# Altium PCB UVM AERO BSPD.PcbDoc (part 2 of 2)
Units mil, origin at the board's own origin, x right, y up, seen from the top; angles counter-clockwise.
Board outline 3235 x 3490 mil, 2 copper layers (Top Layer, Bottom Layer), stack 58.8 mil thick; 114 components, 64 nets, 312 pads, 72 vias.
Unrouted connection lines stored in the file: 7.
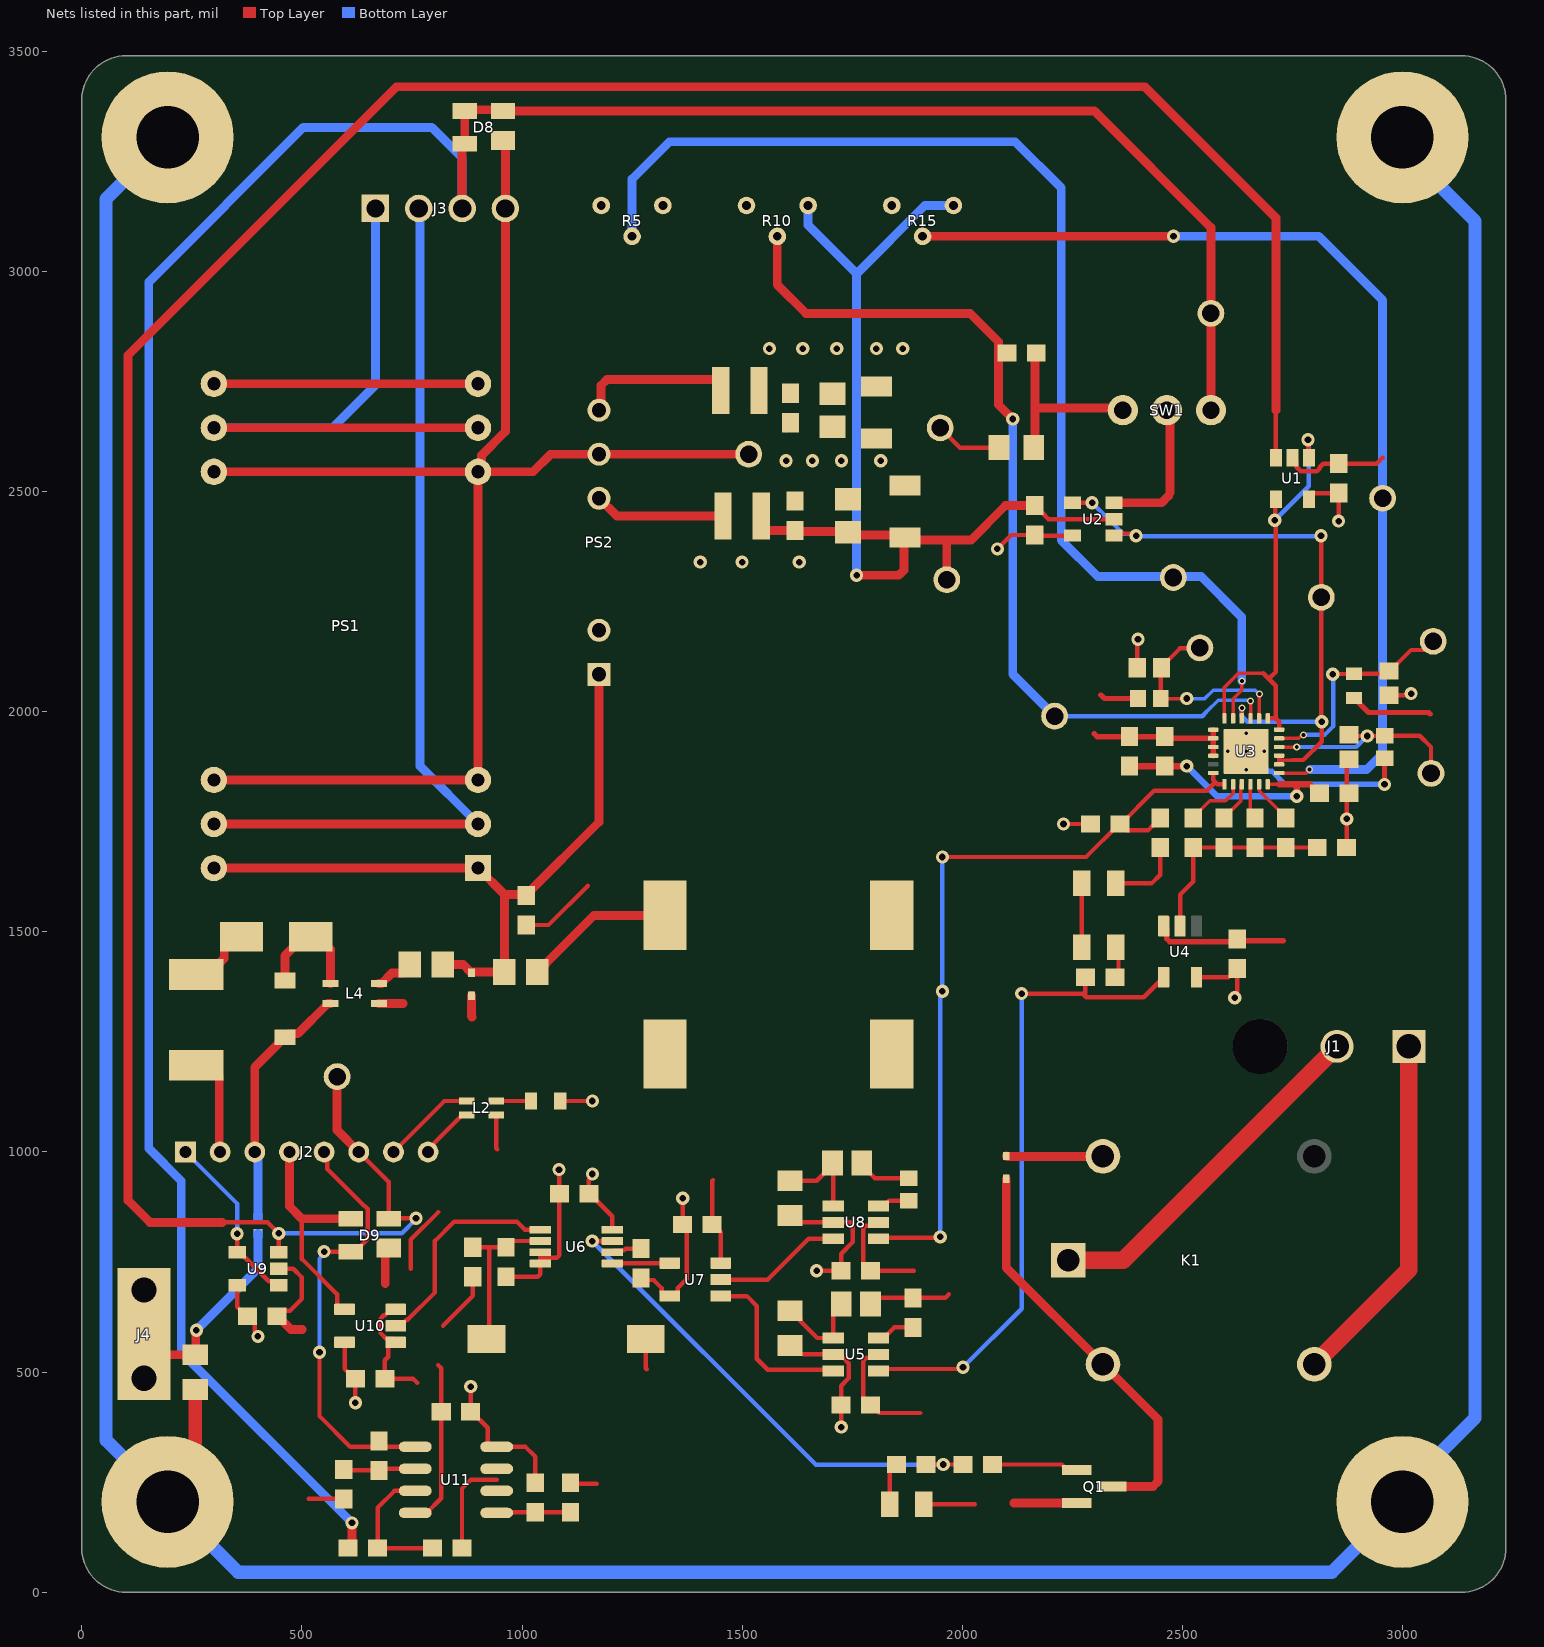
[diagram p2: the nets of this part, all layers, seen from the top]

## Part data (continued)
SW2: library part CMP-2000-07501-1, "FSMSM Push Button Switch, 50 mA, -35 to 85 degC, 2-Pin SMD, RoHS, Tape and Reel", Case\/Package=SMD/SMT, Contact Current Rating=50mA, Contact Resistance=100mOhm, Manufacturer="TE Connectivity", Max Operating Temperature=85degC, Max Voltage Rating (DC)=12V, Min Operating Temperature=-35degC, Operating Force=180gf, Package Description="2-Pin Surface Mount Device, Body 6 x 3.5 mm, Pitch 9.19 mm", Package Quantity=1800, Voltage Rating (DC)=24V, Actuator Length=1.07mm, Actuator Material=Polyamide, Contact Material=Brass, Contact Plating=Silver, Current Rating=50mA, Datasheet URL=http://www.te.com/commerce/DocumentDelivery/DDEController?Action=showdoc&DocId=Customer+Drawing%7F1437566-3%7FC2%7Fpdf%7FEnglish%7FENG_CD_1437566-3_C2_1437566_3_1_c.dwg.pdf%7F1437566-4, Datasheet Version="Rev. C2, 08/2014", Electrical Life=20000Cycles, ELV=Compliant, Illumination Type=Illuminated, Lead Free=LeadFree, Manufacturer URL=http://www.te.com/, Mechanical Life=20000Cycles, Mount=SurfaceMount, Mounting Technology=SurfaceMount, Orientation=Straight, Package Reference=FSMSMTR, Packaging=TapeandReel, REACH SVHC=Unknown, RoHSCompliant=true, Switch Travel=0.25mm, Termination=GullWing, Throw Configuration=SPST
TP1 TP2 TP3 TP4 TP5 TP9 TP10 TP11 TP12: "Test Point, White, 1-Pin THD, RoHS, Bulk", Color=White, Manufacturer=KeystoneElectronics, Supplier Part Number 1=36-5002-ND, Brand=KeystoneElectronics, Contact Material=PhosphorBronze, Datasheet URL=https://ciiva.com/datasheet-click-2917627?src=ciiva&sig=bd195616, Datasheet Version="Rev. G, 12/2008", Length=7.62mm, Manufacturer URL=http://www.keyelco.com/, Material=Nylon, Mounting Hole Size=1mm, Outside Diameter=2.54mm, Packaging=Bulk, Plating=Silver, Product=TestPoints, Product Category=CircuitBoardHardware-PCB, RoHS=True, Supplier 1=Digi-Key, Type=Miniature
TP6: "Test Point, Red, 1-Pin THD, RoHS, Bulk", Color=Red, Manufacturer=KeystoneElectronics, Supplier Part Number 1=36-5000-ND, Brand=KeystoneElectronics, Contact Material=PhosphorBronze, Datasheet URL=https://ciiva.com/datasheet-click-2917627?src=ciiva&sig=bd195616, Datasheet Version="Rev. G, 12/2008", Length=7.62mm, Manufacturer URL=http://www.keyelco.com/, Material=Nylon, Mounting Hole Size=1mm, Outside Diameter=2.54mm, Packaging=Bulk, Plating=Silver, Product=TestPoints, Product Category=CircuitBoardHardware-PCB, RoHS=True, Supplier 1=Digi-Key, Type=Miniature
TP7: "Test Point, Black, 1-Pin THD, RoHS, Bulk", Color=Red, Manufacturer=KeystoneElectronics, Supplier Part Number 1=36-5001-ND, Brand=KeystoneElectronics, Contact Material=PhosphorBronze, Datasheet URL=https://ciiva.com/datasheet-click-2917627?src=ciiva&sig=bd195616, Datasheet Version="Rev. G, 12/2008", Length=7.62mm, Manufacturer URL=http://www.keyelco.com/, Material=Nylon, Mounting Hole Size=1mm, Outside Diameter=2.54mm, Packaging=Bulk, Plating=Silver, Product=TestPoints, Product Category=CircuitBoardHardware-PCB, RoHS=True, Supplier 1=Digi-Key, Type=Miniature
TP8: "Test Point, Green, 1-Pin THD, RoHS, Bulk", Color=Red, Manufacturer=KeystoneElectronics, Supplier Part Number 1=36-5116-ND, Brand=KeystoneElectronics, Contact Material=PhosphorBronze, Datasheet URL=https://ciiva.com/datasheet-click-2917627?src=ciiva&sig=bd195616, Datasheet Version="Rev. G, 12/2008", Length=7.62mm, Manufacturer URL=http://www.keyelco.com/, Material=Nylon, Mounting Hole Size=1mm, Outside Diameter=2.54mm, Packaging=Bulk, Plating=Silver, Product=TestPoints, Product Category=CircuitBoardHardware-PCB, RoHS=True, Supplier 1=Digi-Key, Type=Miniature
U1 U2 U9: library part CMP-1310-00381-1, "Low Voltage, Rail-to-Rail Output Operational Amplifier, 1.7 to 5.5 V, -40 to 85 degC, 5-Pin TSOP, Pb-Free, Tape and Reel", Manufacturer="On Semiconductor", ComponentLink1Description="Manufacturer URL", ComponentLink1URL=http://www.onsemi.com/, ComponentLink2Description=Datasheet, ComponentLink2URL=http://www.onsemi.cn/pub_link/Collateral/NCS2003-D.PDF, ComponentLink3Description="Package Specification", ComponentLink3URL=http://www.onsemi.com/pub_link/Collateral/483.PDF, DatasheetVersion="Rev. 3", Mounting Technology="Surface Mount", PackageDescription="5-Pin Small Outline Package, Body 3 x 1.5 mm, Pitch 0.95 mm", PackageReference=TSOP-5-483-02, PackageVersion="Rev. K, 04/2013", Packing="Tape and Reel", PartNumber=NCS2003SN2T1G, RoHS=TRUE, VCC Max (V)=5.5, VCC Min (V)=1.7
U3: "Hex Window Comparator with 1.5% Precision and 400mV Reference, 24-pin LLP, 250 Reel", Manufacturer="Texas Instruments", PackageTopMarking=NS*UZXYTT*L7231SQ, PowerWise=N, Supplier Part Number 1=LMV7231SQE/NOPBCT-ND, Code_JEDEC=MO-220-WGGD-6, ComponentLink1Description="Datasheet URL", ComponentLink1URL=http://www.ti.com/general/docs/lit/getliterature.tsp?genericPartNumber=LMV7231&fileType=pdf, CompType=Comparator, PackageDescription="LLP, Plastic, Quad, 4 x 4 x 0.8mm Body, 24 Lead, 0.5mm Pitch, No Pullback", PackageReference=RTW0024A, PinCount=24, RoHS=Y, Supplier 1=Digi-Key
U4: library part CMP-0859-00134-3, "Single Inverter, DBV0005A, LARGE T&R", F @ Nom Voltage(Max)(Mhz)=150, Generic Part Number=SN74LVC1G04, ICC @ Nom Voltage(Max)(mA)=0.01, Manufacturer="Texas Instruments", Operating Temperature Range(C)="-40 to 125,-40 to 85", Rating=Catalog, tpd @ Nom Voltage(Max)(ns)=7.5,5.2,4.2,3.7, Voltage(Nom)(V)=1.8,2.5,3.3,5, 3-State Output=No, Bits(#)=1, DatasheetVersion=SCES214AD, Input Type=CMOS/TTL, Logic=Inverting, Output Drive (IOL/IOH)(Max)(mA)=32/-32, Output Type=CMOS, PackageReference=DBV0005A, Schmitt Trigger=No, Sub-Family="Inverting Buffer/Driver", Technology Family=LVC, VCC(Max)(V)=5.5, VCC(Min)(V)=1.65
U5 U8: "IC DELAY LINE 8TAP PROG TSOT23-6", Capacitance=SKIP, Digikey Part Number=LTC6994CS6-1#TRMPBFCT-ND, Manufacturer="Linear Technologies", Mouser Part Number=584-C6994CS6-1TRMPBF, Package=TSOT23-6, Temperature="0°C to +70°C", Temperature Range High=+70°C, Temperature Range Low=0°C, ComponentLink1Description=Upverter, ComponentLink1URL=https://upverter.com/upn/revision/f62c3d807553aaaa/, ComponentLink2Description=Datasheet, ComponentLink2URL=http://cds.linear.com/docs/en/datasheet/699412fb.pdf, Datasheet Path=datasheets/IC_Linear_Technologies_LTC6994CS6-1#TRMPBF_eec.pdf, Datasheet Path1=datasheets/IC_Linear_Technologies_LTC6994CS6-1#TRMPBF_eec.pdf, Digikey Description="IC DELAY LINE 8TAP PROG TSOT23-6", helpURL=https://upverter.com/upn/revision/f62c3d807553aaaa/, Inductance=SKIP, Lead Free=yes, Library Path1=parts/IC_Linear_Technologies_LTC6994CS6-1#TRMPBF_eec.SchLib, Library Ref1=LTC6994CS6-1#TRMPBF, Part Number=LTC6994CS6-1#TRMPBF, Price=2.01987952065, Resistance=SKIP, RoHS=TRUE, Supplier 1=Digi-Key, Supplier 2=Mouser, Supplier Part Number 1=LTC6994CS6-1#TRMPBFCT-ND, Supplier Part Number 2=584-C6994CS6-1TRMPBF, Voltage=SKIP
U6: library part CMP-0859-00537-3, "Single Positive-Edge-Triggered D-Type Flip-Flop with Clear and Preset, DCT0008A, LARGE T&R", F @ Nom Voltage(Max)(Mhz)=150, Generic Part Number=SN74LVC2G74, ICC @ Nom Voltage(Max)(mA)=0.01, Manufacturer="Texas Instruments", Operating Temperature Range(C)="-40 to 125,-40 to 85", Rating=Catalog, tpd @ Nom Voltage(Max)(ns)=13.4,7.1,5.9,4.1, Voltage(Nom)(V)=1.8,2.5,3.3,5, 3-State Output=No, Bits(#)=1, DatasheetVersion=SCES203O, Input Type=CMOS/TTL, Logic=True, Output Drive (IOL/IOH)(Max)(mA)=32/-32, Output Type=CMOS, PackageReference=DCT0008A, Schmitt Trigger=No, Sub-Family="D-Type Flip-Flop", Technology Family=LVC, VCC(Max)(V)=5.5, VCC(Min)(V)=1.65
U7: library part CMP-0859-00067-3, "Single 2-Input Positive-OR Gate, DBV0005A, LARGE T&R", F @ Nom Voltage(Max)(Mhz)=75, Generic Part Number=SN74AHCT1G32, ICC @ Nom Voltage(Max)(mA)=0.01, Manufacturer="Texas Instruments", Operating Temperature Range(C)="-40 to 125", Rating=Catalog, tpd @ Nom Voltage(Max)(ns)=8, Voltage(Nom)(V)=5, 3-State Output=No, Bits(#)=1, DatasheetVersion=SCLS320O, Gate Type=OR, Input Type=CMOS, Logic=True, Output Drive (IOL/IOH)(Max)(mA)=8/-8, Output Type=CMOS, PackageReference=DBV0005A, Schmitt Trigger=No, Sub-Family="OR Gate", Technology Family=AHCT, VCC(Max)(V)=5.5, VCC(Min)(V)=2
U10: library part CMP-0859-00122-3, "Single Power Supply, Single BUFFER GATE w/ 3-State Output (active low enable), DBV0005A, LARGE T&R", F @ Nom Voltage(Max)(Mhz)=50, Generic Part Number=SN74LV1T125, ICC @ Nom Voltage(Max)(mA)=0.01, Manufacturer="Texas Instruments", Operating Temperature Range(C)="-40 to 125", Rating=Catalog, tpd @ Nom Voltage(Max)(ns)=14.5,9.5,8.0,6.5, Voltage(Nom)(V)=1.8,2.5,3.3,5.5, 3-State Output=Yes, Bits(#)=1, DatasheetVersion=SCLS745A, Input Type=TTL, Logic=True, Output Drive (IOL/IOH)(Max)(mA)=8/-8, Output Type=CMOS, PackageReference=DBV0005A, Schmitt Trigger=No, Special Features="1.8V to 3.3V Up Translation,3.3V to 1.8V Down Translation,5V Input Tolerant", Sub-Family="Non-Inverting Buffer/Driver", Technology Family=LV1T, VCC(Max)(V)=5.5, VCC(Min)(V)=1.6
U11: library part CMP-0187-00288-2, "1 MHz, Low-Power Operational Amplifier, 8-Pin SOIC, Industrial Temperature, Tape and Reel", Code_IPC=SOIC127P600-8, Code_JEDEC=MS-012, ComponentLink1Description="Manufacturer URL", ComponentLink1URL=http://www.microchip.com/, ComponentLink2Description=Datasheet, ComponentLink2URL=http://ww1.microchip.com/downloads/en/DeviceDoc/21733j.pdf, ComponentLink3Description="Package Specification", ComponentLink3URL=http://www.microchip.com/stellent/groups/techpub_sg/documents/packagingspec/en012702.pdf, DatasheetVersion="revJ, Nov-2009", PackageDescription="8-Lead Plastic Small Outline (SN) - Narrow, 3.90mm Body [SOIC]", PackageReference=SOIC-SN8, PackageVersion="revBB, Aug-2009", RevisionNote="URLs added."

## Via types
v1: diameter 30, hole 15, Top Layer to Bottom Layer, tented both sides, 60 vias
v2: diameter 16, hole 9, Top Layer to Bottom Layer, tented both sides, 7 vias
v3: diameter 19.68, hole 7.87, Top Layer to Bottom Layer, tented both sides, 5 vias

## Nets (pads, with @x,y where several pads share a name; then routed paths per layer and width w, separated by ;. In a path a pad name is that pad's centre, name@x,y a point inside that pad or via, vN(x,y) a via of type N, cw(c..) or ccw(c..) an arc to the next point about the centre after c; other vN are vias at no path point)
2.5_FB: R35.1 U11.6 U11.7 | length 222.2
  Top Layer w10: R35.1@863.78,100 863.78,235.31 883.46,255 942.52,255
2.5_RDIV: R36.1 R37.2 U11.5 | length 168.1
  Top Layer w10: U11.5@942.52,180 944.06,181.54 R37.2@1110,181.54
5V_COMP: C12.2 C13.2 FB2.2 U3.24 | length 561.2
  Top Layer w8: U3.24@2694.21,1835.2 2719.8,1835.2
  Top Layer w10: FB2.2@2809.5,1815 FB2.2@2811.5,1815
  Top Layer w15: C12.2@2380,1876.54 C13.2@2460,1876.54 v1(2510,1876.54) ; 2719.8,1835.2 2760,1835.2 ; v1(2760,1808) 2760,1835.2 ; FB2.2@2809.5,1815 2789.3,1835.2 2760,1835.2
  Bottom Layer w15: v1(2510,1876.54) 2578.54,1808 v1(2760,1808)
12V_CAP: C8.1 C9.1 R1.2 | length 345.9
  Top Layer w20: R1.2@1034.8,1408.62 1034.8,1412.56 1050.39,1428.15 1054.33,1428.15 1163.66,1537.48 C8.1@1325,1537.48
+5: C2.2 C3.2 C4.2 C10.2 C11.2 C14.2 C15.2 C16.2 C18.2 C19.2 C20.2 C21.2 C22.2 D6.1 F1.1 FB2.1 K1.5 L1.2 R3.2 R4.2 R5.1 R10.1 R11.1 R12.2 R13.2 R14.2 R15.1 R20.2 R23.2 R25.2 R26.1 R36.2 TP6.1 U1.5 U2.5 U4.5 U5.5 U6.7 U6.8 U7.5 U8.5 U9.5 U10.5 U11.8 | length 3265.7
  Top Layer w10: U9.5@352.76,697.32 352.76,648.31 374.57,626.5 C20.2@376.54,626.5 378.5,626.5 393.19,611.81 393.19,593.22 400,586.41 v1(400,581) ; U10.5@596.93,567.6 596.93,507.64 619.57,485 C21.2@621.54,485 v1(621.54,430.36) ; v1(883.46,467) C22.2@883.46,410 885.43,410 921.93,373.5 921.93,336.29 928.22,330 U11.8@942.52,330 1007.99,330 1030,307.99 R36.2@1030,248.46 ; R26.1@963.46,716.54 1035.91,716.54 1041.77,722.39 U6.8@1041.77,746.61 1041.77,759.41 ; U6.7@1041.77,772.2 1041.77,759.41 ; v1(1083.96,960) 1085,958.96 C19.2@1085,905 1085,765.27 1079.14,759.41 1041.77,759.41 ; F1.1@1086.93,1115.75 v1(1160,1115.75) ; R23.2@1270.28,713.54 1274.74,709.07 1298.92,709.07 1317.14,690.85 1317.14,680.39 1324.94,672.6 U7.5@1335.39,672.6 1345.85,672.6 1353.65,680.39 1353.65,690.85 1373.78,710.98 1373.78,826.22 C18.2@1365,835 v1(1365,895) ; R20.2@1608.46,560.63 1627.09,542.01 1635.86,542.01 1637.87,540 U5.5@1706.89,540 1714.09,532.8 1729.06,532.8 1741.91,519.95 1741.91,485.84 1725,468.93 C16.2@1725,425 v1(1725,375) ; R25.2@1608.46,855.63 1624.09,840 U8.5@1706.89,840 1745.67,840 1751.53,834.14 1751.53,795.46 1725,768.93 C15.2@1725,730 v1(1669.29,730) ; TP6.1@1950,2645 1995,2600 R3.2@2083.82,2600 ; v1(2080,2370) 2111.54,2401.54 C11.2@2165,2401.54 2166.54,2400 U2.5@2250.51,2400 ; v1(2230,1745) R11.1@2291.54,1745 ; R14.2@2397.44,2100 2397.44,2162.72 v1(2399.41,2164.68) ; U4.5@2532.4,1396.93 2604.46,1396.93 2607.41,1399.88 2610.31,1399.88 C14.2@2625,1414.57 ; v1(2618.98,1350.43) 2618.98,1355.84 2625,1361.86 C14.2@2625,1414.57 ; C14.2@2625,1416.54 C14.2@2625,1414.57 ; U1.5@2787.4,2482.76 2787.4,2487.76 2796.18,2496.54 C10.2@2855,2496.54 v1(2855,2433) ; R4.2@2873.46,1691.54 2873.46,1887.25 R12.2@2878.5,1892.28 ; R13.2@2970,2037.44 3015.93,2037.44 v1(3019.65,2041.16)
  Top Layer w20: D6.1@2100,990.98 2100.98,990 K1.5@2319.69,990
  other v1: 2873.46,1756.5 1561.93,2825 1637.82,2825 1715,2825 1805,2825 1865,2825
+5_EXT: J2.7 L2.3 | length 214.7
  Top Layer w10: J2.7@707.95,1000 823.7,1115.75 L2.3@874.7,1115.75
+5_EXT_F: F1.2 L2.4 | length 78.4
  Top Layer w10: L2.4@941.63,1115.75 F1.2@1020,1115.75
+5_OUT: L1.1 PS2.7 | length 355.3
  Top Layer w20: PS2.7@1175,2685 1179.37,2689.37 1179.37,2741.14 1193.23,2755 1442.01,2755 1451.69,2745.31 L1.1@1451.69,2730
+12: C1.2 D3.1 FB1.2 PS1.1 PS1.24 PS2.1 R1.1 | length 1631.2
  Top Layer w20: PS1.24@300,1645 PS1.1@900,1645 960,1585 ; FB1.2@819.8,1425.75 866.36,1425.75 D3.1@885,1407.11 886.52,1408.62 R1.1@960,1408.62 960,1585 ; C1.2@1010,1582.48 1010,1584.45 C1.2@1010.55,1585 ; PS2.1@1175,2085 1175,1749.45 C1.2@1010.55,1585 ; 960,1585 C1.2@1010.55,1585
+15: J3.1 PS1.11 PS1.14 | length 1408.5
  Top Layer w20: PS1.14@300,2645 PS1.11@900,2645
  Bottom Layer w20: PS1.14@300,2645 570,2645 667,2742 J3.1@667.03,3143.31
-5: C5.1 C6.1 C7.1 C11.1 L3.2 R10.3 R15.3 TP7.1 U2.2 | length 2322.1
  Top Layer w10: C11.1@2165,2468.46 2165,2466.5 2179.69,2451.81 2181.65,2451.81 2196.06,2437.4 U2.2@2345,2437.4
  Top Layer w20: L3.2@1543.31,2445 1543.31,2421.22 1552.99,2411.54 C5.1@1620,2411.54 1621.97,2409.57 1738.03,2409.57 C6.1@1740,2407.6 1745.83,2401.77 1864.17,2401.77 1867.66,2398.28 1867.66,2321.72 1855.94,2310 v1(1760,2310) ; C7.1@1875.94,2390 1965,2390 ; TP7.1@1965,2300 1965,2390 ; C11.1@2165,2468.46 2098.46,2468.46 2020,2390 1965,2390
  Bottom Layer w20: R10.3@1650,3150 1650,3105 1760,2995 ; v1(1760,2310) 1760,2995 ; R15.3@1980,3150 1915,3150 1760,2995
-5_OUT: L3.1 PS2.5 | length 298.3
  Top Layer w20: PS2.5@1175,2485 1215,2445 L3.1@1456.69,2445
-15: J3.2 PS1.2 PS1.23 | length 2053
  Top Layer w20: PS1.23@300,1745 PS1.2@900,1745
  Bottom Layer w20: J3.2@768,3143.31 768,1877 PS1.2@900,1745
\OOR_FLT: R4.1 R6.2 R7.2 R8.2 R9.2 U4.2 | length 472.4
  Top Layer w10: U4.2@2495,1513.07 2495,1584.47 2525,1614.47 R9.2@2525,1691.54 R8.2@2595,1691.54 R7.2@2665.16,1691.54 R6.2@2735,1691.54 R4.1@2806.54,1691.54
\RST: C17.1 R26.2 SW2.1 U6.6 | length 391.7
  Top Layer w10: C17.1@888.46,783.46 925.96,783.46 ; SW2.1@925.96,550.96 925.96,783.46 ; U6.6@1041.77,797.8 977.8,797.8 R26.2@963.46,783.46 925.96,783.46
BRAKE_BUF: U1.1 U1.4 U3.6 U3.7 U3.12 | length 1006.3
  Top Layer w8: U3.12@2595.79,1984.8 2595.79,2055.52 2627.7,2087.44 2683.74,2087.44
  Top Layer w10: 2683.74,2087.44 2696.46,2074.72 ; U3.7@2694.21,1984.8 2694.21,1984.92 2694.29,1985 2712.3,1985 ; U1.4@2712.6,2482.76 2711.3,2481.46 2711.3,2436.3 v1(2710,2435) 2712,2433 2712,2090.26 2696.46,2074.72 ; U3.6@2719.8,1959.21 2719.8,1977.5 2712.3,1985 ; v1(2785.57,2617.66) 2786.48,2616.75 2786.48,2578.16 U1.1@2787.4,2577.24 ; 2696.46,2074.72 2712.3,2058.88 2712.3,1985
  Bottom Layer w10: v1(2710,2435) 2787.4,2512.4 2787.4,2615.83 v1(2785.57,2617.66)
BRAKE_IN: D9.2 J2.6 TP1.1 U1.3 U9.3 | length 6625.4
  Top Layer w10: 319.13,840 422.24,840 v1(447.24,815) U9.3@447.24,772.12 ; J2.6@629.21,1000 697.31,931.91 D9.2@697.31,848.4 698.21,849.3 v1(759.1,849.3) ; U1.3@2712.6,2577.24 2712.6,2685
  Top Layer w20: 319.13,840 155,840 105,890 105,2810 715,3420 2415,3420 2712.6,3122.4 2712.6,2685 ; TP1.1@580,1171 580,1049.21 J2.6@629.21,1000
  Bottom Layer w10: v1(447.24,815) 726.6,815 759.1,847.5 v1(759.1,849.3)
BRAKE_OOR_H: R14.1 R18.2 TP11.1 U3.8 | length 469.5
  Top Layer w8: R18.2@2450.59,2030 v1(2510,2030) ; U3.8@2674.53,1984.8 2675,1985.28 v2(2675,2040)
  Top Layer w10: R18.2@2450.59,2030 2450.59,2100 2494.49,2143.9 2538.9,2143.9 TP11.1@2540,2145
  Bottom Layer w8: v1(2510,2030) 2551.16,2030 2570.2,2049.04 2665.96,2049.04 v2(2675,2040)
BRAKE_OOR_L: R13.1 R17.2 TP10.1 U3.5 | length 502.7
  Top Layer w8: U3.5@2719.8,1939.53 2764.34,1939.53 2772.21,1947.4 v2(2774.85,1947.4)
  Top Layer w10: v1(2841.77,2085) 2842.49,2085.72 2889.28,2085.72 R17.2@2890,2086.44 2963.88,2086.44 R13.1@2970,2092.56 2971.97,2092.56 3019.65,2140.24 3055.24,2140.24 TP10.1@3065,2150
  Bottom Layer w10: v2(2774.85,1947.4) 2823.21,1947.4 2842.54,1966.73 2842.54,2084.23 v1(2841.77,2085)
BRAKE_OUT: J2.1 U9.1 U9.4 | length 401.9
  Top Layer w10: v1(352.76,814) U9.4@352.76,772.12 358.66,772.12 424.68,706.1 438.46,706.1 U9.1@447.24,697.32
  Bottom Layer w10: J2.1@235.51,1000 352.76,882.76 v1(352.76,814)
BRAKE_THRESH: R5.2 TP4.1 U3.11 | length 2704.6
  Top Layer w8: U3.11@2615.47,1984.8 2615.47,2029.35 2635.16,2049.04 v2(2635.16,2069.44)
  Bottom Layer w10: 2635,2215 2635.16,2214.84
  Bottom Layer w20: R5.2@1250,3080 1250,3210 1335,3295 2120,3295 2225,3190 2225,2825 2225,2390 2307.68,2307.32 2479.57,2307.32 2542.68,2307.32 2635,2215 ; v2(2635.16,2069.44) 2635.16,2214.84
BSPD_FLT: R11.2 R24.1 U3.18 U3.19 U8.1 | length 1853.1
  Top Layer w10: U8.1@1810.04,802.6 1812.26,804.82 1947.78,804.82 v1(1950,807.04) ; v1(1955,1670) 2281.46,1670 2356.46,1745 R11.2@2358.46,1745 ; R24.1@2450,1758.46 2450,1756.46 2435.5,1741.96 2433.5,1741.96 2422.04,1730.5 2372.96,1730.5 R11.2@2358.46,1745 ; U3.18@2570.2,1860.79 2570.2,1845 2575.1,1840.1 ; U3.19@2595.79,1835.2 2580,1835.2 2575.1,1840.1 ; R11.2@2358.46,1745 2360.46,1745 2436.4,1820.94 2555.94,1820.94 2575.1,1840.1
  Bottom Layer w10: v1(1950,807.04) 1950,1360 v1(1955,1365) v1(1955,1670)
BSPD_OK: R29.1 R30.1 U6.3 | length 1137.4
  Top Layer w10: v1(1159.78,797.37) 1159.99,797.58 1204.95,797.58 U6.3@1205.16,797.8 ; R30.1@1917.46,290 v1(1957,290) R29.1@2001.54,290
  Bottom Layer w10: v1(1159.78,797.37) 1667.65,289.5 1956.5,289.5 v1(1957,290)
CHASS: J4.1 NT1.2 R31.1 | length 566.9
  Top Layer w20: J4.1@141,686 J4.1@141,586 187.63,539.37 254.57,539.37 258.94,543.74 v1@258.94,593.66
  Bottom Layer w20: v1(260.28,595) 400,734.72 NT1.2@400,815
CO1: R6.1 U3.23 | length 101.8
  Top Layer w8: U3.23@2674.53,1835.2 2674.53,1820.94 2735,1760.46 R6.1@2735,1758.46
CO2: R7.1 U3.22 | length 81
  Top Layer w8: U3.22@2654.84,1835.2 2654.84,1768.78 R7.1@2665.16,1758.46
CO3: R8.1 U3.21 | length 94.1
  Top Layer w8: R8.1@2595,1758.46 2595,1760.46 2611.5,1776.96 2612.72,1776.96 2633.24,1797.48 2633.24,1833.28 U3.21@2635.16,1835.2
CO4: R9.1 U3.20 | length 135.3
  Top Layer w8: R9.1@2525,1758.46 2525,1760.46 2562.01,1797.48 2597.95,1797.48 2615.47,1815 U3.20@2615.47,1835.2
CUR_BUF: TP2.1 U2.1 U2.4 U3.2 U3.3 U3.10 | length 1481.2
  Top Layer w8: U3.10@2635.16,1984.8 v2(2635.16,2008.24) ; 2719.8,1890.31 2750,1890.31
  Top Layer w10: U2.4@2250.51,2474.8 2250.61,2474.9 2294.9,2474.9 v1(2295,2475) ; U2.1@2345,2400 2350,2405 2384.59,2405 2389.59,2400 v1(2395,2400) ; U3.2@2719.8,1880.47 2719.8,1890.31 U3.3@2719.8,1900.16 ; 2750,1890.31 2774.85,1890.31 2816.54,1932 v1(2816.54,1977.5) 2815.77,1978.27 2815.77,2399.23 v1(2815,2400)
  Bottom Layer w10: v1(2295,2475) 2366.17,2403.83 2391.17,2403.83 2396,2399 2814,2399 v1(2815,2400) ; v2(2635.16,2008.24) 2635.16,1990 2647.66,1977.5 v1(2816.54,1977.5)
CUR_BUF_IN: SW1.2 U2.3 | length 320.5
  Top Layer w20: U2.3@2345,2474.8 2453.27,2474.8 2468.47,2490 ; SW1.2@2465,2685 2472.29,2677.71 2472.29,2497.29
CUR_IN: D8.2 D8.3 D8.4 J3.3 R34.1 SW1.3 TP3.1 | length 6515.9
  Top Layer w20: R34.1@605,100 613.7,108.7 v1(613.7,157.3) ; J3.3@863.88,3143.31 863.88,3283.88 D8.4@870,3290 D8.3@870,3364.8 ; D8.3@870,3367.4 D8.2@956.61,3367.4 ; D8.2@956.61,3364.8 956.81,3365 2300,3365 2565,3100 TP3.1@2565,2905 SW1.3@2565,2685
  Bottom Layer w20: v1(613.7,157.3) 226,545 226,933.98 152,1007.98 152,2976 503.4,3327.4 795,3327.4 863.88,3258.52 J3.3@863.88,3143.31
CUR_OOR_H: R12.1 R16.2 TP9.1 U3.4 | length 468.9
  Top Layer w8: U3.4@2719.8,1919.84 v2@2760,1919.84
  Top Layer w10: R12.1@2878.5,1947.4 2880.9,1945 v1(2920,1945) 2959.41,1945 R16.2@2960,1945.59 3039.41,1945.59 3065,1920 TP9.1@3065,1860
  Bottom Layer w10: v2(2760,1920) 2895,1920 v1(2920,1945)
CUR_OOR_L: R15.2 TP12.1 U3.1 | length 2388.6
  Top Layer w8: U3.1@2719.8,1860.79 2781.43,1860.79 v2(2789.3,1868.66)
  Top Layer w20: R15.2@1910,3080 v1(2480,3080)
  Bottom Layer w20: v1(2480,3080) 2810,3080 2955,2935 2955,2305 2955,1905 2918.66,1868.66 v2(2789.3,1868.66)
CUR_OUT: D9.4 J2.5 R32.1 U11.1 | length 974.2
  Top Layer w10: v1(540,544.96) 540,400 610,330 U11.1@757.48,330 ; v1(550.47,773.6) 620.54,773.6 648.86,801.93 648.86,825.74 649.25,826.13 649.25,870.67 642.81,877.12 641.86,877.12 557.6,961.38 557.6,992.87 J2.5@550.47,1000
  Bottom Layer w10: v1(540,544.96) 540,757.74 550.47,768.21 v1(550.47,773.6)
CUR_TEST: R2.2 R3.1 SW1.1 | length 419
  Top Layer w20: R3.1@2162.56,2600 2165.41,2602.84 2165.41,2690 ; R2.2@2168.25,2815 2165.41,2812.16 2165.41,2690 ; SW1.1@2365,2685 2360,2690 2165.41,2690
CUR_THRESH: R2.1 R10.2 TP5.1 U3.9 | length 2069.9
  Top Layer w8: U3.9@2654.84,1984.8 2655,1984.96 v2(2655,2024.88)
  Top Layer w20: R10.2@1580,3080 1580,2970 1645,2905 2017.63,2905 2082.36,2840.27 2082.36,2800 2082.36,2697.64 v1(2115,2665)
  Bottom Layer w8: 2555,2000 2581.24,2026.24 2653.64,2026.24 v2(2655,2024.88)
  Bottom Layer w10: TP5.1@2210,1990 2545,1990 2555,2000
  Bottom Layer w20: v1(2115,2665) 2115,2085 TP5.1@2210,1990
D+: D1.2 D2.1 L4.1 | length 266.8
  Top Layer w20: D2.1@461.26,1389.37 461.26,1445.43 504.57,1488.74 D1.2@520.31,1488.74 536.06,1488.74 564.88,1459.92 L4.1@564.88,1382.64
F_DIV: R25.1 R28.1 U8.4 | length 214.6
  Top Layer w10: R25.1@1608.46,934.37 1669.29,934.37 1705,970.08 R28.1@1705,975 1706.89,973.11 U8.4@1706.89,877.4
F_SET: R27.2 U8.3 | length 73.4
  Top Layer w10: U8.3@1810.04,877.4 1821.85,877.4 1833.86,889.41 R27.2@1878.46,889.41
FAULT_BUF: D9.3 J2.4 U10.4 | length 525.4
  Top Layer w10: 500,848.4 500,756.57 580.23,676.35 580.23,650.2 588.02,642.4 U10.4@596.93,642.4
  Top Layer w20: J2.4@471.73,1000 471.73,876.67 500,848.4 D9.3@610.69,848.4
FAULT_DET: U6.5 U10.2 | length 502.7
  Top Layer w10: U10.2@713.07,605 723.9,605 737.5,618.61 740.12,618.61 802.17,680.66 802.17,797.86 845.69,841.37 988.63,841.37 1006.61,823.39 U6.5@1041.77,823.39
FAULT_EN: R23.1 U6.2 | length 74
  Top Layer w10: U6.2@1201.3,768.35 U6.2@1205.16,772.2 1209.02,776.06 1231.37,776.06 1235.78,780.47 R23.1@1270.28,780.47
FAULT_TIM: U7.2 U8.6 | length 293.7
  Top Layer w10: U7.2@1451.54,710 1558.46,710 1651.06,802.6 U8.6@1706.89,802.6
FLT_LED: D5.A R24.2 | length 156.2
  Top Layer w10: D5.A@2363.58,1610 2430,1610 2450,1630 R24.2@2450,1691.54
FUSED: D1.1 F2.2 | length 153.4
  Top Layer w20: F2.2@260,1402.95 286.97,1402.95 323.62,1439.61 323.62,1465.28 347.09,1488.74 D1.1@362.83,1488.74
GND: C1.1 C2.1 C3.1 C4.1 C5.2 C6.2 C7.2 C8.2 C9.2 C10.1 C12.1 C13.1 C14.1 C15.1 C16.1 C17.2 C18.1 C19.1 C20.1 C21.1 C22.1 D3.2 D4.C D5.C D7.C D8.1 D9.1 J3.4 L2.1 L4.3 PS1.3 PS1.10 PS1.12 PS1.13 PS1.15 PS1.22 PS2.2 PS2.6 Q1.2 R5.3 R16.1 R17.1 R18.1 R21.1 R22.2 R27.1 R28.2 R33.1 R37.1 SW2.2 TP8.1 U1.2 U3.13 U3.14 U3.15 U3.16 U3.25 U4.3 U5.2 U6.4 U7.3 U8.2 U9.2 U10.1 U10.3 U11.4 | length 8898.3
  Top Layer w10: C20.1@443.46,626.5 456.47,639.51 473.01,639.51 500,666.5 500,715.04 480.31,734.72 U9.2@447.24,734.72 ; 515,212.62 593.91,212.62 R33.1@595,211.54 ; U10.3@713.07,642.4 702.24,642.4 688.64,628.8 686.02,628.8 678.45,621.23 678.45,588.77 691.83,575.39 705.28,575.39 U10.1@713.07,567.6 704.16,567.6 696.37,559.8 696.37,534.66 688.46,526.75 C21.1@688.46,485 752.6,485 762.4,475.19 ; 746.93,734.48 746.93,800.36 810.1,863.54 ; U11.4@757.48,180 783.07,180 816.54,213.46 C22.1@816.54,410 816.54,508.57 810.1,515 ; 820.41,605 888.46,673.05 C17.2@888.46,716.54 ; L2.1@941.63,1084.25 941.63,1008.42 943.96,1006.09 ; C1.1@1010,1515.55 1060.2,1515.55 1149.65,1605 ; R37.1@1110,248.46 1111.96,246.5 1170,246.5 ; v1(1160,950) 1160,944.59 1151.93,936.52 C19.1@1151.93,905 1153.9,905 1205.16,853.74 U6.4@1205.16,823.39 ; SW2.2@1280.91,575 1280.91,508.23 1283.04,506.1 ; 1433.9,936.34 1431.93,934.37 C18.1@1431.93,835 1433.9,835 1451.54,817.36 U7.3@1451.54,747.4 ; R28.2@1771.93,975 1771.93,970.08 1801.42,940.59 R27.1@1878.46,940.59 ; R22.2@1791.93,655 1805.39,668.46 R21.1@1888.46,668.46 1961.75,668.46 1969.78,676.5 ; U5.2@1810.04,540 1802.83,532.8 1782.63,532.8 1775.02,525.19 1775.02,445.54 1775.28,445.29 1775.28,439.69 1789.96,425 C16.1@1791.93,425 1793.9,425 1811.9,407 1904.96,407 ; U8.2@1810.04,840 1802.83,832.8 1780.88,832.8 1775.02,826.94 1775.02,750.54 1775.28,750.29 1775.28,744.69 1789.96,730 C15.1@1791.93,730 1890.38,730 ; D7.C@1912.58,200 2029.04,200 ; D4.C@2271.42,1465.21 D5.C@2271.42,1610 ; U1.2@2750,2577.24 2758.78,2568.46 2758.78,2556.85 2769.07,2546.56 2805.74,2546.56 2812.18,2553 2812.18,2555.33 2820.31,2563.46 C10.1@2855,2563.46 2941.22,2563.46 2955,2577.24
  Top Layer w12: 2300,1950 2306.54,1943.46 C12.1@2380,1943.46 C13.1@2460,1943.46 2463.94,1939.53 U3.14@2570.2,1939.53 ; 2315,2038.19 2323.19,2030 R18.1@2399.41,2030 ; U4.3@2457.6,1513.07 2464.39,1506.28 2464.39,1484.48 2471.42,1477.45 2618.98,1477.45 C14.1@2625,1483.46 2628.46,1480 2730,1480 ; U3.16@2570.2,1900.16 U3.15@2570.2,1919.84 U3.14@2570.2,1939.53 ; U3.13@2570.2,1959.21 U3.14@2570.2,1939.53 ; R17.1@2890,2031.32 2893.94,2031.32 2901.72,2023.54 2901.72,2019.6 2923.25,1998.07 3059.9,1998.07 3062.97,1995 ; v1(2959.41,1835) 2959.41,1893.82 R16.1@2960,1894.41
  Top Layer w20: PS1.22@300,1845 PS1.3@900,1845 PS1.10@900,2545 ; PS1.15@300,2545 PS1.10@900,2545 ; PS1.13@300,2745 PS1.12@900,2745 ; C20.1@443.46,626.5 445.43,626.5 475.43,596.5 500,596.5 ; L4.3@675.12,1337.36 729.41,1337.36 ; 689.38,700.9 689.38,773.54 D9.1@697.31,781.47 ; D3.2@885,1355.14 885,1308.37 886.52,1306.85 ; D8.1@956.61,3297.87 962.3,3292.18 962.3,2636.59 907.65,2581.94 907.65,2552.65 PS1.10@900,2545 ; TP8.1@1510.33,2585 PS2.6@1175,2585 1065,2585 1025,2545 PS1.10@900,2545 ; C2.1@1600.31,2644.88 1610,2654.57 C2.1@1610,2656.54 C2.1@1614.47,2652.07 ; C3.1@1700.53,2652.07 C3.1@1705,2647.6 ; 2117.6,202.6 Q1.2@2260.63,202.6
  Bottom Layer w12: 2688.19,1880.47 2688.19,1872.72 2696.09,1864.82 2703.84,1864.82 2733.66,1835 v1(2959.41,1835)
  other v1: 1405,2340 1500,2340 1630,2340 1600,2570 1659.75,2570 1725.59,2570 1815,2570
  other v3: 2645,1868.66 2603.66,1910 2645,1910 2686.34,1910 2645,1951.34
GND_EXT: J2.8 L2.2 | length 126.5
  Top Layer w10: J2.8@786.69,1000 786.69,1006.09 864.86,1084.25 L2.2@874.7,1084.25
IN+: F2.1 J2.2 | length 235.3
  Top Layer w20: F2.1@260,1197.05 286.97,1197.05 312.01,1172.01 312.01,1002.24 J2.2@314.25,1000
IN-: D2.2 J2.3 L4.2 NT1.1 | length 580.8
  Top Layer w20: J2.3@392.99,1000 392.99,1192.36 447.24,1246.61 447.24,1252.72 455.16,1260.63 D2.2@461.26,1260.63 469.17,1268.54 490.47,1268.54 559.29,1337.36 L4.2@564.88,1337.36
  Bottom Layer w20: J2.3@392.99,1000 400,992.99 NT1.1@400,850
L+: FB1.1 L4.4 | length 90
  Top Layer w20: L4.4@675.12,1382.64 680.71,1382.64 704.29,1406.22 729.41,1406.22 745,1421.81 FB1.1@745,1425.75
LATCH_IN: U6.1 U7.4 | length 130.6
  Top Layer w10: U6.1@1205.16,746.61 1205.55,747.01 1335,747.01 U7.4@1335.39,747.4
MTG: MTG1.1 MTG2.1 MTG3.1 MTG4.1 R31.2 | length 9669.8
  Top Layer w30: MTG4.1@195,205 195,278.06 257.6,340.66 R31.2@257.6,458.66
  Bottom Layer w30: MTG1.1@195,3305 55,3165 55,345 MTG4.1@195,205 355,45 2840,45 MTG3.1@3000,205 3000,230.77 3165,395.77 3165,3114.23 3000,3279.23 MTG2.1@3000,3305
O_DIV: R20.1 R22.1 U5.4 | length 212.1
  Top Layer w10: R20.1@1608.46,639.37 1613.39,639.37 1632.01,620.75 1632.01,615.83 1670.43,577.4 U5.4@1706.89,577.4 1706.89,636.89 R22.1@1725,655
O_SET: R21.2 U5.3 | length 88.4
  Top Layer w10: U5.3@1810.04,577.4 1821.85,577.4 1845.98,601.54 R21.2@1888.46,601.54
OOR_FLT: R19.1 U4.4 U5.1 | length 1490.4
  Top Layer w10: U5.1@1810.04,502.6 1814.33,506.89 1998.05,506.89 v1(2001.88,510.72) ; v1(2135,1359.66) 2273.65,1359.66 2281.84,1351.47 ; R19.1@2279.88,1396.93 2279.88,1353.43 2281.84,1351.47 ; U4.4@2457.6,1396.93 2412.14,1351.47 2281.84,1351.47
  Bottom Layer w10: v1(2001.88,510.72) 2135,643.84 v1(2135,1359.66)
OOR_LED: D4.A R19.2 | length 76.7
  Top Layer w10: R19.2@2354.81,1392.14 2354.93,1392.26 D4.A@2354.93,1468.8
OOR_TIM: U5.6 U7.1 | length 396.1
  Top Layer w10: U7.1@1451.54,672.6 1510.87,672.6 1533.46,650 1533.46,530 1558.46,505 1704.49,505 U5.6@1706.89,502.6
RELAY-: D6.2 K1.2 Q1.3 | length 940.7
  Top Layer w20: D6.2@2100,939.02 2100,737.24 K1.2@2319.69,517.56 2445,392.24 2445,251.72 2433.28,240 Q1.3@2339.37,240
RELAY_CRTL: Q1.1 R29.2 | length 197.4
  Top Layer w10: R29.2@2068.46,290 2226.38,290 2238.98,277.4 Q1.1@2260.63,277.4
RL_LED: D7.A R30.2 | length 96.6
  Top Layer w10: D7.A@1835.42,200 1835.42,275.5 1849.92,290 R30.2@1850.54,290
SHDN_IN: J1.2 K1.1 | length 812.1
  Top Layer w40: K1.1@2240.94,753.78 2365.42,753.78 J1.2@2851.64,1240
SHDN_OUT: J1.1 K1.3 | length 811.3
  Top Layer w40: K1.3@2800,517.56 3014.63,732.19 J1.1@3014.63,1240
VN: R32.2 R33.2 U11.2 | length 164.7
  Top Layer w10: R33.2@595,278.46 596.93,276.54 R32.2@675,276.54 678.46,280 U11.2@757.48,280
VP: R34.2 R35.2 U11.3 | length 318.1
  Top Layer w10: U11.3@757.48,230 710.2,230 671.93,191.73 R34.2@671.93,100 R35.2@796.85,100
pads on no net: J1.3 K1.4 U3.17 U4.1
copper on no net:
  other v1: 2735,860 2062.59,997.41 2180,1065

## Polygon pours and split planes (outlines as drawn)
GND on Top Layer "TOP_GND" (solid, remove dead copper, pour order 8): 3235,100 cw(c3135,100) 3135,0 100,0 cw(c100,100) 0,100 0,3390 cw(c100,3390) 100,3490 3135,3490 cw(c3135,3390) 3235,3390
GND on Top Layer "GND_PSU" (solid, remove dead copper, pour order 5): 1134.18,2742 1134.18,2526 1930,2330 1930,2780
+5 on Top Layer "+5_TOP" (solid, remove dead copper, pour order 0): 1510,2850 1510,2675 2003.94,2600 1995,2850
+5 on Bottom Layer "BOT_+5" (solid, remove dead copper, pour order 7): 3235,100 cw(c3135,100) 3135,0 100,0 cw(c100,100) 0,100 0,3390 cw(c100,3390) 100,3490 3135,3490 cw(c3135,3390) 3235,3390
GND on Bottom Layer "BOT_GND_PS" (solid, pour order 6): 1900,2794.31 1900,2040 1130,2040 1085,2085 1085,2790

## Keep-outs
Top Layer:
  rectangle: 2690.06,1360 3215,1444.19
  rectangle: 2066.2,3131.65 2811.2,3446.65
  region: 1545,2147.44 1545,1760.32 1946.81,1760.32 1946.81,1856.41 2241.89,1856.41 2241.89,1930 2078.19,1930 2006.07,1930 2006.07,2078.76 2291.54,2078.76 2291.54,2142.44

## Other copper
Top Layer:
  rectangle net GND: 2570.2,1893.97 2597.52,1949.37
  rectangle net +5: 1025,745 1066.38,772.2
  rectangle net 2.5_FB: 912.99,230 970,280
  rectangle net 12V_CAP: 1320,1485 1840,1590
  rectangle net GND: 1280,1160 1855,1270
  pour cut-out: 181.27,1156.01 338.73,1156.01 338.73,1441.01 181.27,1441.01
Bottom Layer:
  rectangle net GND: 2587.51,1858.82 2702.09,1962.17
  pour cut-out: 2807.76,1283.88 3055,1283.88 3055,1196.12 2807.76,1196.12
  pour cut-out: 182.54,1160 340,1160 340,1445 182.54,1445
Multi-Layer:
  pour cut-out: 992.44,1147.24 1114.49,1147.24 1114.49,1084.25 992.44,1084.25

## Silkscreen, mask and mechanical layers (free items; w line width, h text height)
Top Overlay:
  drawing of 5 lines, arcs and shapes, not listed
  text "BRK_TH" at 1115,3285 h50
  text "CUR_TH" at 1450,3285 h50
  text "CUR_L" at 1800,3285 h50
  text "Test     Sensor" at 2195,2760 h50
  text "BSPD + CurMon V 1.0 / Designed by: / Andrew Katz / aakatz3@gmail.com / '.ModifiedDate'" at 1560,1785 h100
  text "FLT" at 2091,1576 h50
  text "OOR" at 2091,1433 h50
  text "Shutdown Loop" at 2675.02,1375 h50
  text "BSPD RST" at 923,418 h50
  text "RELAY ON" at 1721,64 h50
Bottom Overlay:
  drawing of 6 lines, arcs and shapes, not listed
  text "+15 / -15 / CUR / 0V" at 976,3078 h50 r90
  text "BRAKE Check" at 1805,1179.2 h60
  text "GND_EXT / +5_EXT / BRAKE_IN / CUR_ISO / FAULT_ISO / IN- / IN+ / GND_IN" at 149,604.55 h50 r270

## Text inside footprints (layer, text, board x,y; h text height)
C1: Mechanical 3 "SS 102512, ADDED SILKSCREEN." at 984,1491.02 h1 r90
C2: Mechanical 3 "SS 102512, ADDED SILKSCREEN." at 1584,2632 h1 r90
C3: Mechanical 3 "SS 102512, ADDED SILKSCREEN." at 1669,2613 h1 r90
C5: Mechanical 3 "SS 102512, ADDED SILKSCREEN." at 1594,2387 h1 r90
C6: Mechanical 3 "SS 102512, ADDED SILKSCREEN." at 1704,2373 h1 r90
C10: Mechanical 3 "SS 102512, ADDED SILKSCREEN." at 2881,2588 h1 r270
C11: Mechanical 3 "SS 102512, ADDED SILKSCREEN." at 2191,2493 h1 r270
C12: Mechanical 3 "SS 102512, ADDED SILKSCREEN." at 2406,1968 h1 r270
C13: Mechanical 3 "SS 102512, ADDED SILKSCREEN." at 2486,1968 h1 r270
C14: Mechanical 3 "SS 102512, ADDED SILKSCREEN." at 2651,1508 h1 r270
C15: Mechanical 3 "SS 102512, ADDED SILKSCREEN." at 1816.46,704 h1 r180
C16: Mechanical 3 "SS 102512, ADDED SILKSCREEN." at 1816.46,399 h1 r180
C17: Mechanical 3 "SS 102512, ADDED SILKSCREEN." at 914.46,808 h1 r270
C18: Mechanical 3 "SS 102512, ADDED SILKSCREEN." at 1456.46,809 h1 r180
C19: Mechanical 3 "SS 102512, ADDED SILKSCREEN." at 1176.46,879 h1 r180
C20: Mechanical 3 "SS 102512, ADDED SILKSCREEN." at 468,600.5 h1 r180
C21: Mechanical 3 "SS 102512, ADDED SILKSCREEN." at 713,459 h1 r180
C22: Mechanical 3 "SS 102512, ADDED SILKSCREEN." at 792,436 h1
FB1: Mechanical 3 "2. SS 102512, ADDED SILKSCREEN." at 715.4,1462.75 h1; Mechanical 3 "HISTORY: 1. MT 090909, UPDATED WITH ASSY & COURTYARD DETAILS. EXTRUDED 3D RE-SIZED BASED ON TDK SMT INDUCTORS." at 715.47,1465.12 h1; Mechanical 3 "FOOTPRINT WHERE USED: 1. PASSIVE COMPONENTS/EMI FERRITE BEADS AND CHIPS:SMT INDUCTORS" at 715.47,1460.2 h1
FB2: Mechanical 3 "LOCATION: SURFACEMOUNT2LEAD.PCBLIB" at 2907,1788 h1 r180; Mechanical 3 "HISTORY: MT 021011, OLDER FOOTPRINT, SAME SIZE AS 0603_RES FOOTPRINT." at 2907,1790 h1 r180; Mechanical 3 "SS 102512, ADDED SILKSCREEN." at 2839,1790 h1 r180
MTG1: Mechanical 3 "HISTORY: SS 091913, CREATED PER SPACEX BASIC F/P AND SYMBOL CREATION STANDARDS." at 159,3463 h1; Mechanical 3 "LOCATION: TOOL-TEST-MTG.PCBLIB" at 180,3465 h1
MTG2: Mechanical 3 "HISTORY: SS 091913, CREATED PER SPACEX BASIC F/P AND SYMBOL CREATION STANDARDS." at 2964,3463 h1; Mechanical 3 "LOCATION: TOOL-TEST-MTG.PCBLIB" at 2985,3465 h1
MTG3: Mechanical 3 "HISTORY: SS 091913, CREATED PER SPACEX BASIC F/P AND SYMBOL CREATION STANDARDS." at 2964,363 h1; Mechanical 3 "LOCATION: TOOL-TEST-MTG.PCBLIB" at 2985,365 h1
MTG4: Mechanical 3 "LOCATION: TOOL-TEST-MTG.PCBLIB" at 180,365 h1; Mechanical 3 "HISTORY: SS 091913, CREATED PER SPACEX BASIC F/P AND SYMBOL CREATION STANDARDS." at 159,363 h1
R1: Mechanical 3 "HISTORY: MT 021711, OLDER FOOTPRINT. STANDARD MAX HEIGHT 1.1MM" at 930.4,1444.62 h1; Mechanical 3 "LOCATION: SURFACEMOUNT2LEAD.PCBLIB" at 930.4,1446.62 h1; Mechanical 3 "2. SS 102512, ADDED SILKSCREEN." at 930.4,1442.62 h1
R2: Mechanical 3 "SS 102512, ADDED SILKSCREEN." at 2077.78,2841 h1
R4: Mechanical 3 "SS 102512, ADDED SILKSCREEN." at 2783,1717.54 h1
R6: Mechanical 3 "SS 102512, ADDED SILKSCREEN." at 2761,1782 h1 r270
R7: Mechanical 3 "SS 102512, ADDED SILKSCREEN." at 2691.16,1782 h1 r270
R8: Mechanical 3 "SS 102512, ADDED SILKSCREEN." at 2621,1782 h1 r270
R9: Mechanical 3 "SS 102512, ADDED SILKSCREEN." at 2551,1782 h1 r270
R11: Mechanical 3 "SS 102512, ADDED SILKSCREEN." at 2268,1771 h1
R19: Mechanical 3 "SS 102512, ADDED SILKSCREEN." at 2256.34,1422.93 h1
R21: Mechanical 3 "SS 102512, ADDED SILKSCREEN." at 1914.46,692 h1 r270
R23: Mechanical 3 "SS 102512, ADDED SILKSCREEN." at 1296.28,804.01 h1 r270
R24: Mechanical 3 "SS 102512, ADDED SILKSCREEN." at 2476,1782 h1 r270
R26: Mechanical 3 "SS 102512, ADDED SILKSCREEN." at 937.46,693 h1 r90
R29: Mechanical 3 "SS 102512, ADDED SILKSCREEN." at 1978,316 h1
R30: Mechanical 3 "SS 102512, ADDED SILKSCREEN." at 1941,264 h1 r180
R32: Mechanical 3 "SS 102512, ADDED SILKSCREEN." at 701,367 h1 r270
R33: Mechanical 3 "SS 102512, ADDED SILKSCREEN." at 569,188 h1 r90
R34: Mechanical 3 "SS 102512, ADDED SILKSCREEN." at 581.46,126 h1
R35: Mechanical 3 "SS 102512, ADDED SILKSCREEN." at 887.31,74 h1 r180
R36: Mechanical 3 "SS 102512, ADDED SILKSCREEN." at 1004,158 h1 r90
R37: Mechanical 3 "SS 102512, ADDED SILKSCREEN." at 1136,272 h1 r270